# EAGLE board xBeeMSP (EAGLE 9.2.2)
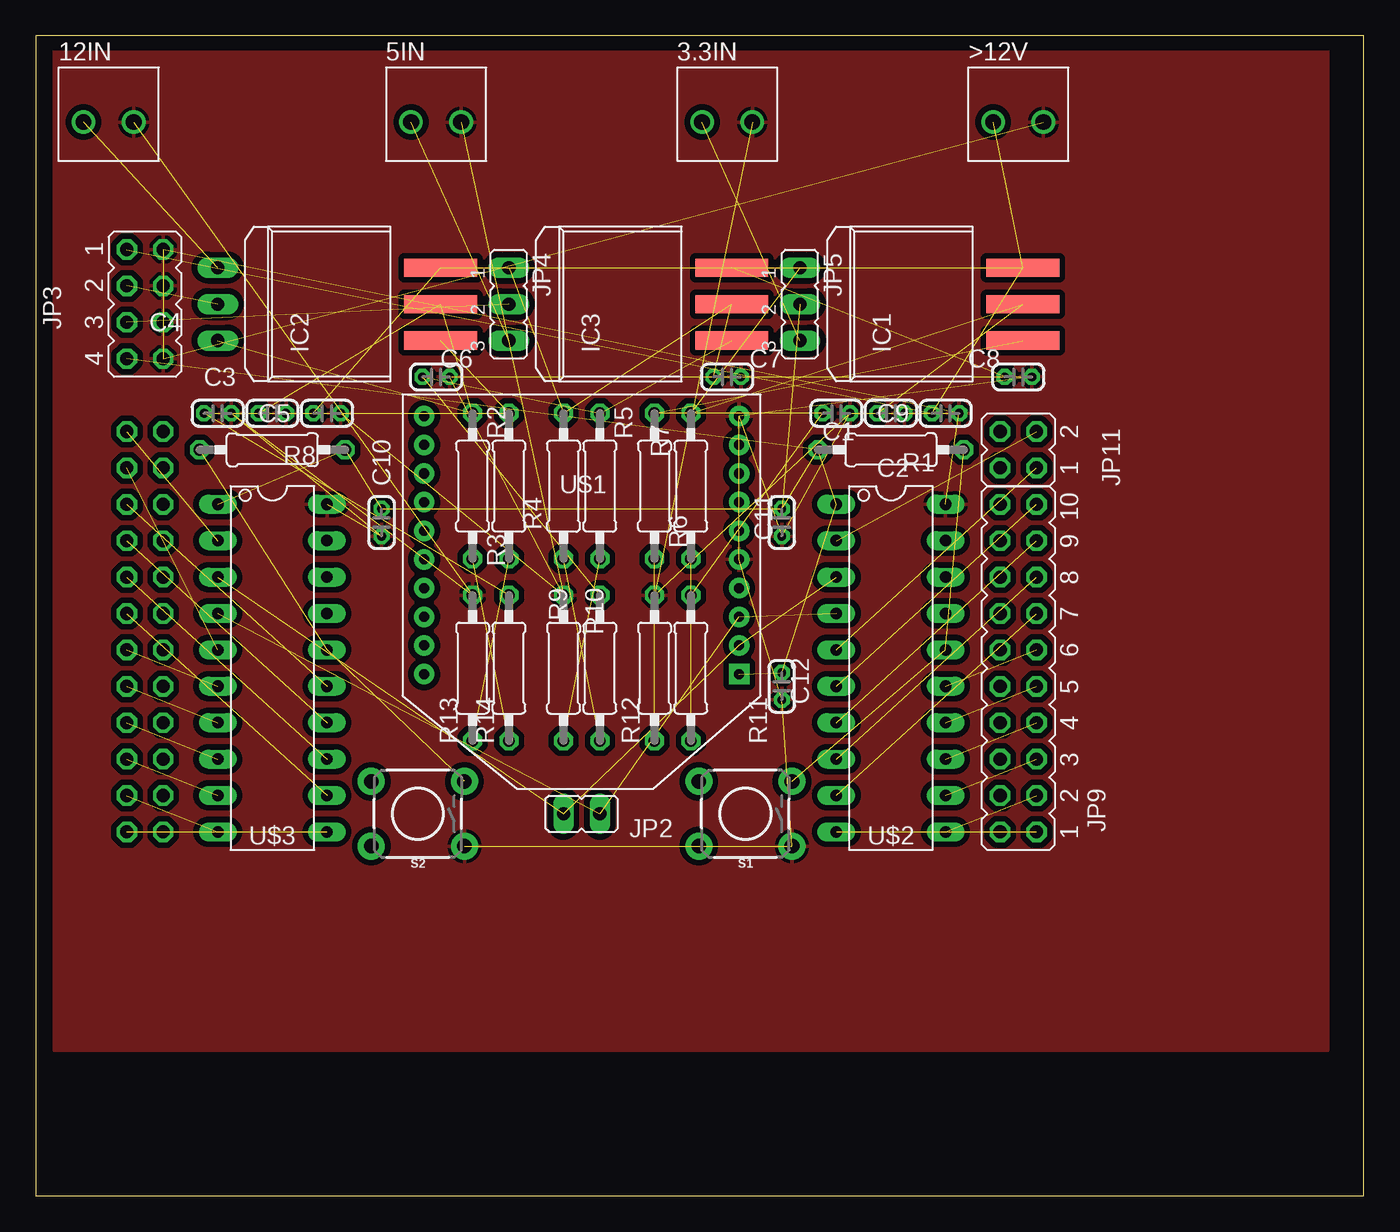
[diagram p0: board, top side]
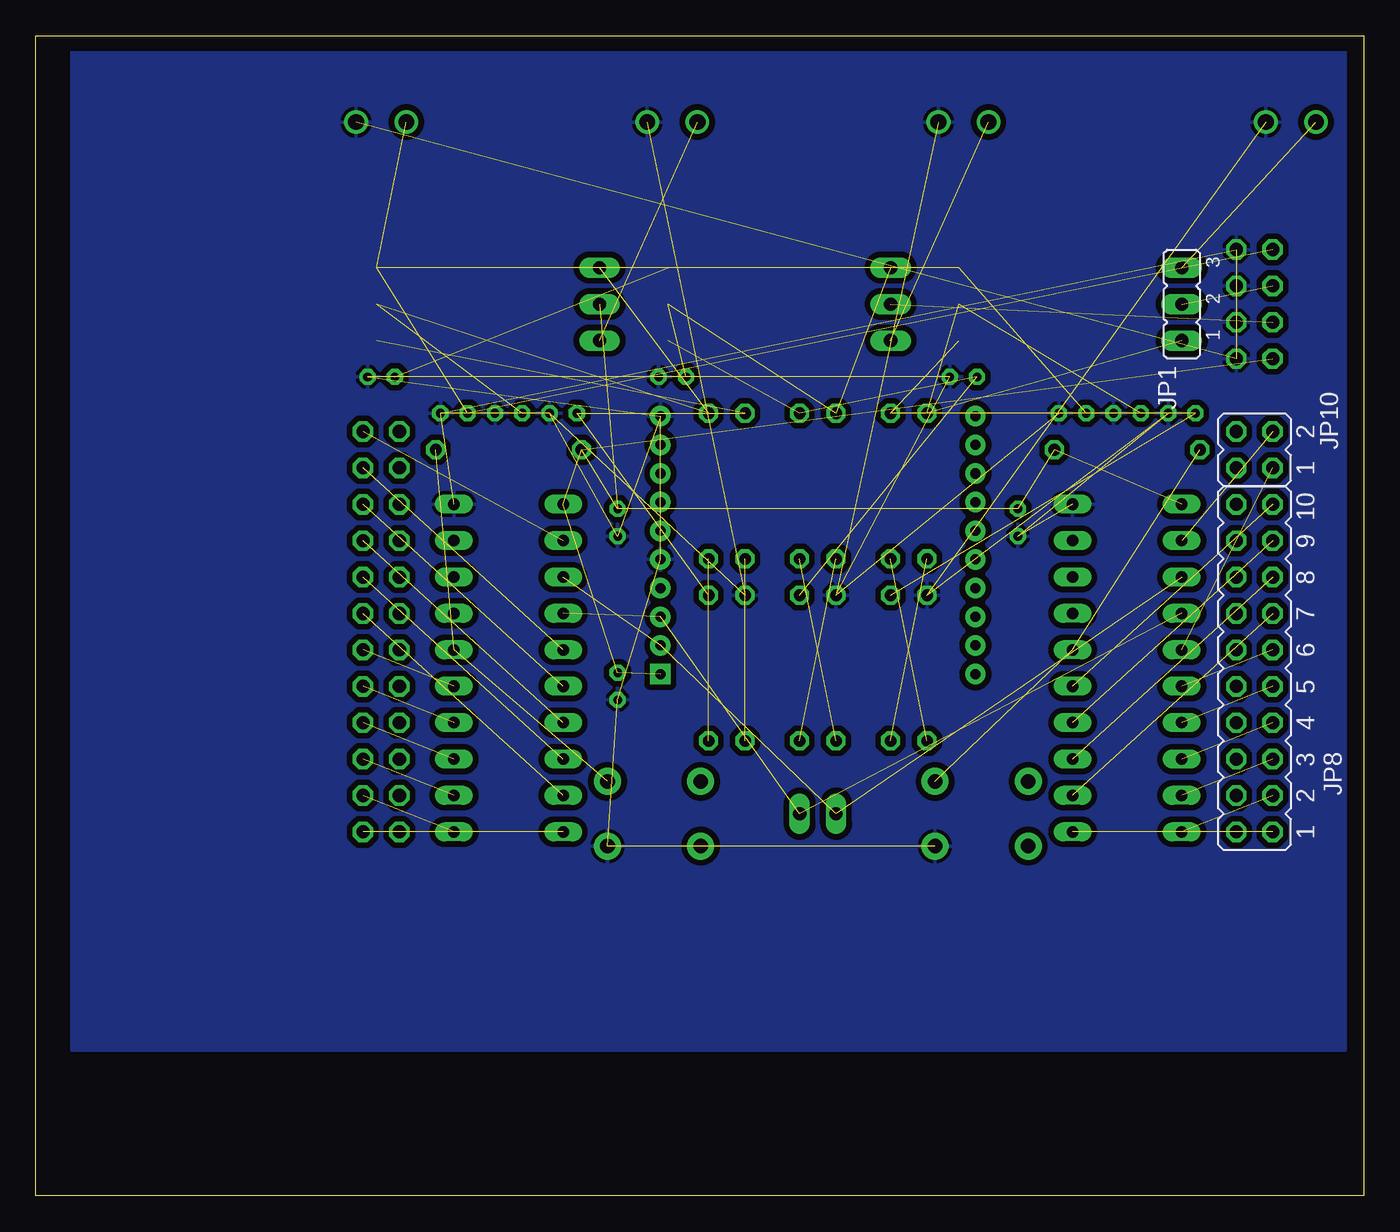
[diagram p1: board, bottom side, seen from below]

Size 92.69 x 80.95 mm. Coordinates in mm from the lower left corner, seen from the top.
Outline: 0,0 92.69,0 92.69,80.95 0,80.95 0,0
Copper layers (1*16): Top 0.035mm / dielectric 1.5mm / Bottom 0.035mm
Design rules "default": minimum track width 6mil, minimum drill 0.35mm, track to track 6mil, track to pad 6mil, pad to pad 6mil, via to via 6mil, smd to smd 6mil, copper to edge 40mil, drill to drill 6mil, minimum pad ring 10mil, minimum via ring 8mil, stop-mask expansion 4mil, vias tented up to drill 0mil, thermal gap 10mil

## Footprints (pad centres in the part's own frame; a part is rotated, then mirrored left to right if it is on the bottom)
ED555/2DS = drill 1.1: 1 -1.75,0; 2 1.75,0
C020-035X018 = drill 0.61 pad 1.016 octagon: 1 -0.953,0; 2 0.953,0
DD-3 = smd 1.27 x 5.08: 1 -2.54,-7.938; 2 0,-7.938; 3 2.54,-7.938
JP2 = drill 0.914 long: 1 -2.54,0; 2 0,0; 3 2.54,0
JP1 = drill 0.914 long: 1 0,-1.27; 2 0,1.27
JP4Q = drill 0.914 octagon: 1 -3.81,-1.27; 2 -3.81,1.27; 3 -1.27,-1.27; 4 -1.27,1.27; 5 1.27,-1.27; 6 1.27,1.27; 7 3.81,-1.27; 8 3.81,1.27
JP10Q = drill 0.914 octagon: 1 -11.43,-1.27; 2 -11.43,1.27; 3 -8.89,-1.27; 4 -8.89,1.27; 5 -6.35,-1.27; 6 -6.35,1.27; 7 -3.81,-1.27; 8 -3.81,1.27; 9 -1.27,-1.27; 10 -1.27,1.27; 11 1.27,-1.27; 12 1.27,1.27; 13 3.81,-1.27; 14 3.81,1.27; 15 6.35,-1.27; 16 6.35,1.27; 17 8.89,-1.27; 18 8.89,1.27; 19 11.43,-1.27; 20 11.43,1.27
JP2Q = drill 0.914 octagon: 1 -1.27,-1.27; 2 -1.27,1.27; 3 1.27,-1.27; 4 1.27,1.27
0207/10 = drill 0.813 octagon: 1 -5.08,0; 2 5.08,0
TACTILE_SWITCH_PTH_6.0MM_KIT = drill 1.016 pad 1.88: 1 -3.251,2.261; 2 3.251,2.261; 3 -3.251,-2.261; 4 3.251,-2.261
XBEE = drill 0.7 pad 1.422 square: 1 -11,5.5 | drill 0.7 pad 1.422: 2 -11,3.5; 3 -11,1.5; 4 -11,-0.5; 5 -11,-2.5; 6 -11,-4.5; 7 -11,-6.5; 8 -11,-8.5; 9 -11,-10.5; 10 -11,-12.5; 11 11,-12.5; 12 11,-10.5; 13 11,-8.5; 14 11,-6.5; 15 11,-4.5; 16 11,-2.5; 17 11,-0.5; 18 11,1.5; 19 11,3.5; 20 11,5.5
N20 = drill 0.813 long: 1 -11.435,-3.81; 2 -8.895,-3.81; 3 -6.355,-3.81; 4 -3.815,-3.81; 5 -1.275,-3.81; 6 1.265,-3.81; 7 3.805,-3.81; 8 6.345,-3.81; 9 8.885,-3.81; 10 11.425,-3.81; 11 11.425,3.81; 12 8.885,3.81; 13 6.345,3.81; 14 3.805,3.81; 15 1.265,3.81; 16 -1.275,3.81; 17 -3.815,3.81; 18 -6.355,3.81; 19 -8.895,3.81; 20 -11.435,3.81

## Placement (x,y rotation side)
3.3IN  ED555/2DS  [ED555/2DS]  48.26,74.93 0 top
5IN  ED555/2DS  [ED555/2DS]  27.94,74.93 0 top
12IN  ED555/2DS  [ED555/2DS]  5.08,74.93 0 top
>12V  ED555/2DS  [ED555/2DS]  68.58,74.93 0 top
C1  10u  [C020-035X018]  55.88,54.61 180 top
C2  10u  [C020-035X018]  59.69,54.61 180 top
C3  10u  [C020-035X018]  12.7,54.61 180 top
C4  10u  [C020-035X018]  16.51,54.61 180 top
C5  10u  [C020-035X018]  20.32,54.61 180 top
C6  10u  [C020-035X018]  27.94,57.15 180 top
C7  10u  [C020-035X018]  48.26,57.15 180 top
C8  10u  [C020-035X018]  68.58,57.15 180 top
C9  10u  [C020-035X018]  63.5,54.61 180 top
C10  10u  [C020-035X018]  24.13,46.99 90 top
C11  10u  [C020-035X018]  52.07,46.99 90 top
C12  10u  [C020-035X018]  52.07,35.56 90 top
IC1  REG1117F  [DD-3]  60.96,62.23 90 top
IC2  REG1117F  [DD-3]  20.32,62.23 90 top
IC3  REG1117F  [DD-3]  40.64,62.23 90 top
JP1  [JP2]  12.7,62.23 90 bottom
JP2  [JP1]  38.1,26.67 90 top
JP3  [JP4Q]  7.62,62.23 270 top
JP4  [JP2]  33.02,62.23 270 top
JP5  [JP2]  53.34,62.23 270 top
JP8  [JP10Q]  7.62,36.83 90 bottom
JP9  [JP10Q]  68.58,36.83 90 top
JP10  [JP2Q]  7.62,52.07 90 bottom
JP11  [JP2Q]  68.58,52.07 90 top
R1  47K  [0207/10]  59.69,52.07 180 top
R2  12a1  [0207/10]  30.48,49.53 90 top
R3  12b1  [0207/10]  33.02,49.53 90 top
R4  113  [0207/10]  36.83,49.53 90 top
R5  340  [0207/10]  39.37,49.53 90 top
R6  115  [0207/10]  45.72,49.53 90 top
R7  187  [0207/10]  43.18,49.53 90 top
R8  47K  [0207/10]  16.51,52.07 0 top
R9  340  [0207/10]  36.83,36.83 270 top
R10  113  [0207/10]  39.37,36.83 270 top
R11  115  [0207/10]  45.72,36.83 270 top
R12  187  [0207/10]  43.18,36.83 270 top
R13  12b2  [0207/10]  30.48,36.83 270 top
R14  12a2  [0207/10]  33.02,36.83 270 top
S1  MOMENTARY-SWITCH-SPST-PTH-6.0MM-KIT  [TACTILE_SWITCH_PTH_6.0MM_KIT]  49.53,26.67 180 top
S2  MOMENTARY-SWITCH-SPST-PTH-6.0MM-KIT  [TACTILE_SWITCH_PTH_6.0MM_KIT]  26.67,26.67 180 top
U$1  XBEE  [XBEE]  38.1,41.91 180 top
U$2  G2X[1/5]2---N20  [N20]  59.69,36.83 270 top
U$3  G2X[1/5]2---N20  [N20]  16.51,36.83 270 top

## Library data of the parts
3.3IN 5IN 12IN >12V = DC_LOAD_AU
C1-C12 = cap-master
IC1-IC3 = burr-brown; MF: TEXAS INSTRUMENTS; MPN: REG1117FAKTTT; OC_FARNELL: 1296120; OC_NEWARK: 87H2562
JP1-JP5 JP8-JP11 = jumper
R1-R14 = resistor
S1 S2 = SparkFun-Switches; PROD_ID: SWCH-08441; SF_SKU: COM-00097
U$1 = adafruit
U$2 U$3 = TI_MSP430_v16

## Nets
3.3VOUT: C2.2 IC1.2 JP5.1 R6.2
5VOUT: C7.2 IC3.2 JP4.1 R4.2
12VOUT: C4.2 IC2.2 JP1.1 R2.2
GND: 3.3IN.2 5IN.2 12IN.2 >12V.2 C1.1 C2.1 C3.1 C4.1 C5.1 C6.1 C7.1 C8.1 C9.1 C10.1 C11.1 C12.1 JP3.2 JP3.4 JP3.6 JP3.8 R9.1 R12.1 R13.1 S1.1 S2.1 U$1.5 U$1.10 U$2.20 U$3.20
N$1: JP2.2 U$1.2 U$2.3 U$3.3
N$2: JP9.3 U$2.11
N$3: JP2.1 U$1.3 U$2.4 U$3.4
N$4: R1.1 S1.3 U$2.16
N$5: JP9.1 U$2.10
N$6: JP9.13 U$2.9
N$7: JP9.15 U$2.8
N$8: JP9.17 U$2.7
N$9: JP9.5 U$2.12
N$10: JP9.19 U$2.6
N$11: JP11.1 U$2.5
N$12: JP11.3 U$2.2
N$13: JP9.7 U$2.13
N$14: JP9.9 U$2.14
N$15: R8.1 S2.3 U$3.16
N$16: JP9.11 U$2.15
N$17: JP10.3 U$3.2
N$18: JP10.1 U$3.5
N$19: JP3.5 JP4.2
N$20: JP8.3 U$3.10
N$21: R2.1 R14.2
N$22: JP8.1 U$3.11
N$23: R4.1 R10.2
N$24: JP8.5 U$3.9
N$25: JP8.7 U$3.8
N$26: JP8.9 U$3.7
N$27: JP8.11 U$3.6
N$28: JP8.13 U$3.12
N$29: C6.2 IC3.1 R5.2 R10.1
N$30: JP8.15 U$3.13
N$31: JP8.17 U$3.14
N$32: JP8.19 U$3.15
N$33: R6.1 R11.2
N$34: R5.1 R9.2
N$35: C1.2 IC1.1 R7.2 R11.1
N$36: R7.1 R12.2
N$37: C3.2 IC2.1 R3.2 R14.1
N$38: 12IN.1 JP1.3
N$39: R3.1 R13.2
N$40: 5IN.1 JP4.3
N$42: >12V.1 C5.2 C8.2 C9.2 IC1.3 IC2.3 IC3.3 JP3.1
N$43: 3.3IN.1 JP5.3
N$46: JP1.2 JP3.3
VCC: C10.2 C11.2 C12.2 JP3.7 JP5.2 R1.2 R8.2 U$1.1 U$2.1 U$3.1

## Tracks (layer width: path | path; a pad name or v marks a point on that pad's centre or on a via)
3.3VOUT  (3 unrouted)
5VOUT  (3 unrouted)
12VOUT  (3 unrouted)
GND  (28 unrouted)
  pour Bottom (isolate 0.406): 1.27,80.01 1.27,10.16 90.17,10.16 90.17,80.01
  pour Top (isolate 0.406): 1.27,80.01 1.27,10.16 90.17,10.16 90.17,80.01
N$1  (3 unrouted)
N$2  (1 unrouted)
N$3  (3 unrouted)
N$4  (2 unrouted)
N$5  (1 unrouted)
N$6  (1 unrouted)
N$7  (1 unrouted)
N$8  (1 unrouted)
N$9  (1 unrouted)
N$10  (1 unrouted)
N$11  (1 unrouted)
N$12  (1 unrouted)
N$13  (1 unrouted)
N$14  (1 unrouted)
N$15  (2 unrouted)
N$16  (1 unrouted)
N$17  (1 unrouted)
N$18  (1 unrouted)
N$19  (1 unrouted)
N$20  (1 unrouted)
N$21  (1 unrouted)
N$22  (1 unrouted)
N$23  (1 unrouted)
N$24  (1 unrouted)
N$25  (1 unrouted)
N$26  (1 unrouted)
N$27  (1 unrouted)
N$28  (1 unrouted)
N$29  (3 unrouted)
N$30  (1 unrouted)
N$31  (1 unrouted)
N$32  (1 unrouted)
N$33  (1 unrouted)
N$34  (1 unrouted)
N$35  (3 unrouted)
N$36  (1 unrouted)
N$37  (3 unrouted)
N$38  (1 unrouted)
N$39  (1 unrouted)
N$40  (1 unrouted)
N$42  (7 unrouted)
N$43  (1 unrouted)
N$46  (1 unrouted)
VCC  (9 unrouted)